# EAGLE board Steeringwheel (EAGLE 9.7.0)
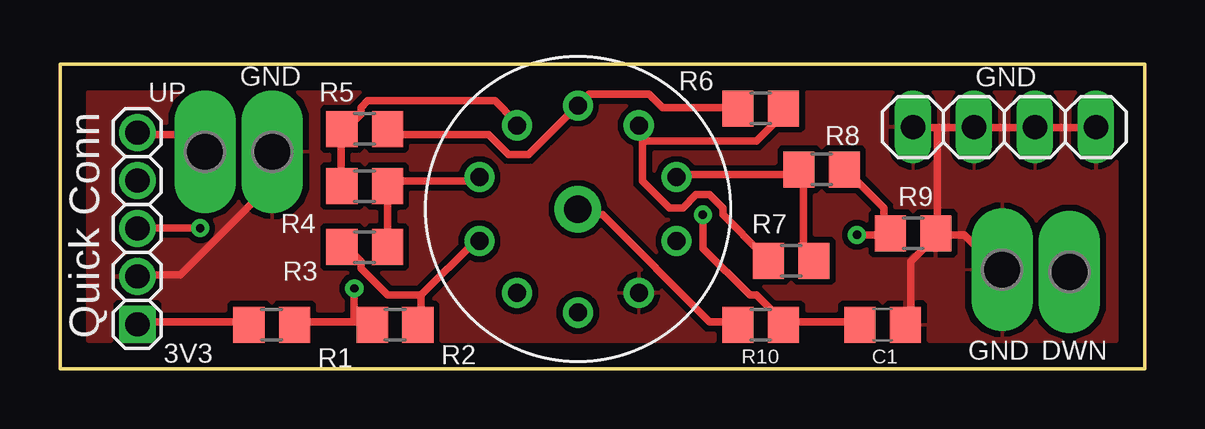
[diagram p0: board, top side]
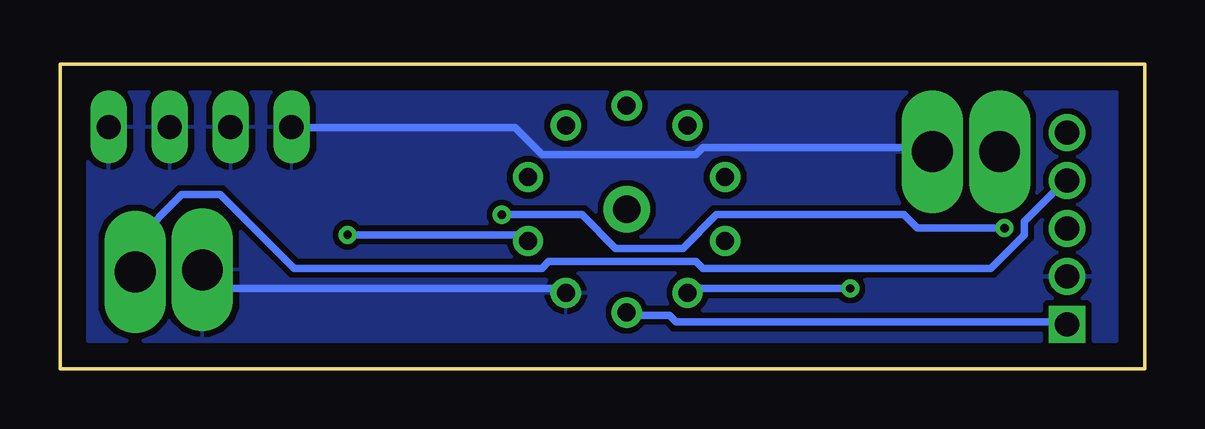
[diagram p1: board, bottom side, seen from below]

Size 45.21 x 12.7 mm. Coordinates in mm from the lower left corner, seen from the top.
Outline: 0,0 0,12.7 45.21,12.7 45.21,0 0,0
Copper layers (1*16): Top 0.035mm / dielectric 1.5mm / Bottom 0.035mm
Design rules "default": minimum track width 6mil, minimum drill 0.35mm, track to track 6mil, track to pad 6mil, pad to pad 6mil, via to via 6mil, smd to smd 6mil, copper to edge 40mil, drill to drill 6mil, minimum pad ring 10mil, minimum via ring 8mil, stop-mask expansion 4mil, vias tented up to drill 0mil, thermal gap 10mil
Net classes: 0 default: width 0.305 mm, clearance 0.254 mm

## Footprints (pad centres in the part's own frame; a part is rotated, then mirrored left to right if it is on the bottom)
C0805 = smd 1.3 x 1.5: 1 -0.95,0; 2 0.95,0
1X04 = drill 1.016 long: 1 -3.81,0; 2 -1.27,0; 3 1.27,0; 4 3.81,0
1_05X2MM = drill 1.016 pad 1.3 square: 1 -4,0 | drill 1.016 pad 1.3: 2 -2,0; 3 0,0; 4 2,0; 5 4,0
R0805 = smd 1.3 x 1.5: 1 -0.95,0; 2 0.95,0
P1-17Y = drill 1.702 pad 2.121 long: TP 0,0
56DP36-01-1-AJN = drill 1.152 pad 1.93: COMMON 0,0 | drill 0.75: P1 0,4.318; P2 2.538,3.493; P3 4.107,1.334; P4 4.107,-1.334; P5 2.538,-3.493; P6 0,-4.318; P7 -2.538,-3.493; P8 -4.107,-1.334; P9 -4.107,1.334; P10 -2.538,3.493

## Placement (x,y rotation side)
C1  [C0805]  34.29,1.84 180 top
GND  PINHD-1X4  [1X04]  39.37,10.08 0 top
QUICK_CONN  PINHD-1X55X2MM  [1_05X2MM]  3.23,5.85 90 top
R1  [R0805]  8.83,1.84 0 top
R2  [R0805]  13.97,1.84 0 top
R3  [R0805]  12.7,5.08 0 top
R4  [R0805]  12.7,7.62 180 top
R5  [R0805]  12.7,10.01 0 top
R6  [R0805]  29.21,10.86 0 top
R7  [R0805]  30.48,4.51 0 top
R8  [R0805]  31.75,8.32 0 top
R9  [R0805]  35.56,5.65 0 top
R10  [R0805]  29.21,1.84 180 top
SHIFT-DOWN_GND  PTR1PAD1-17Y  [P1-17Y]  39.27,4.13 0 top
SHIFT-DOWN_SIGNAL  PTR1PAD1-17Y  [P1-17Y]  42.08,4.04 0 top
SHIFT-UP_GND  PTR1PAD1-17Y  [P1-17Y]  8.85,9.06 0 top
SHIFT-UP_SIGNAL  PTR1PAD1-17Y  [P1-17Y]  6.05,9.06 0 top
U$1  56DP36-01-1-AJN  [56DP36-01-1-AJN]  21.59,6.66 180 top

## Library data of the parts
C1 = rcl; SPICEPREFIX: C
GND QUICK_CONN = Connector; CATEGORY: CONNECTOR; SUB-CATEGORY: PIN-HEADER
R1-R10 = rcl; SPICEPREFIX: R
SHIFT-DOWN_GND SHIFT-DOWN_SIGNAL SHIFT-UP_GND SHIFT-UP_SIGNAL = testpad
U$1 = Grayhill_56DP36-01-1-AJN

## Nets
+5V: QUICK_CONN.1 R1.1 U$1.P1
GND: C1.1 GND.1 GND.2 GND.3 GND.4 QUICK_CONN.2 R9.2 SHIFT-DOWN_GND.TP SHIFT-UP_GND.TP U$1.P10
N$1: R1.2 R2.1 U$1.P2
N$2: R2.2 R3.1 U$1.P3
N$3: R3.2 R4.1 U$1.P4
N$4: R5.2 R6.1 U$1.P6
N$5: R6.2 R7.1 U$1.P7
N$6: R7.2 R8.1 U$1.P8
N$7: R8.2 R9.1 U$1.P9
N$8: QUICK_CONN.5 SHIFT-UP_SIGNAL.TP
N$9: QUICK_CONN.4 SHIFT-DOWN_SIGNAL.TP
N$10: R4.2 R5.1 U$1.P5
N$13: R10.2 U$1.COMMON
OUTPUT: C1.2 QUICK_CONN.3 R10.1

## Tracks (layer width: path | path; a pad name or v marks a point on that pad's centre or on a via)
+5V
  Top 0.305: R1.1 7.8,1.96 3.33,1.96 QUICK_CONN.1
  Bottom 0.305: U$1.P1 21.49,2.23 19.81,2.23 19.53,1.96 3.33,1.96 QUICK_CONN.1
GND
  Top 0.305: QUICK_CONN.2 3.33,3.91 5,3.91 8.64,7.54 8.64,8.94 SHIFT-UP_GND.TP | 36.58,10.06 37.97,10.06 GND.2 38.25,10.06 40.49,10.06 GND.3 40.77,10.06 43,10.06 GND.4 | 36.58,10.06 35.74,10.06 GND.1 | 36.58,5.59 35.46,4.47 35.46,1.96 C1.1 | 36.58,5.59 37.69,5.59 39.09,4.19 SHIFT-DOWN_GND.TP | 36.58,5.59 R9.2 36.58,5.87 36.58,10.06
  Bottom 0.305: U$1.P10 24.28,3.35 38.53,3.35 39.09,3.91 SHIFT-DOWN_GND.TP | SHIFT-UP_GND.TP 8.91,9.22 18.41,9.22 18.69,8.94 25.12,8.94 26.24,10.06 35.46,10.06 GND.1
  pour Top: -1.27,13.97 -1.27,-2.54 46.99,-2.54 46.99,12.7 45.72,13.97
  pour Bottom: -1.27,13.97 -1.27,-2.54 46.99,-2.54 46.99,13.97
N$1  (via drill 0.35)
  Top 0.305: 12.27,1.96 12.83,1.96 R2.1 | 12.27,1.96 10.03,1.96 R1.2 | 12.27,1.96 v12.27,3.35
  Bottom 0.305: v12.27,3.35 18.97,3.35 U$1.P2
N$2
  Top 0.305: 15.06,3.07 15.06,1.96 R2.2 | 15.06,3.07 17.3,5.31 U$1.P3 | 15.06,3.07 13.66,3.07 12.55,4.19 12.55,4.47 11.99,5.03 R3.1
N$3
  Top 0.305: R3.2 13.66,5.31 13.66,7.54 R4.1 13.66,7.82 17.3,7.82 U$1.P4
N$4
  Top 0.305: R5.2 13.66,9.78 17.86,9.78 18.69,8.94 19.53,8.94 21.49,10.9 U$1.P6 21.77,11.18 22.05,11.46 24.56,11.46 25.12,10.9 28.19,10.9 R6.1
N$5
  Top 0.305: 24.28,9.5 24.28,10.06 U$1.P7 | 24.28,9.5 24.28,7.82 25.4,6.71 25.96,6.71 26.52,7.26 27.08,7.26 27.64,6.71 27.64,6.43 29.31,4.75 R7.1 | 24.28,9.5 29.03,9.5 30.15,10.62 R6.2
N$6
  Top 0.305: R7.2 31.27,4.75 30.99,5.03 30.99,8.1 R8.1 30.71,8.1 25.96,8.1 U$1.P8
N$7  (via drill 0.35)
  Top 0.305: R8.2 32.94,8.1 34.34,6.71 34.34,5.87 R9.1 34.34,5.59 v33.22,5.59
  Bottom 0.305: v33.22,5.59 25.96,5.59 U$1.P9
N$8
  Top 0.305: QUICK_CONN.5 3.33,9.78 5.28,9.78 5.84,9.22 SHIFT-UP_SIGNAL.TP
N$9
  Bottom 0.305: QUICK_CONN.4 3.33,7.82 5,6.15 5,5.59 6.4,4.19 18.41,4.19 18.69,4.47 24.84,4.47 25.12,4.19 35.46,4.19 38.53,7.26 39.93,7.26 40.13,7.26 42.08,5.31 SHIFT-DOWN_SIGNAL.TP
N$10
  Top 0.305: R4.2 11.71,7.82 11.71,9.78 R5.1 11.99,10.06 12.55,10.62 12.55,10.9 12.83,11.18 18.14,11.18 18.97,10.34 U$1.P5
N$13
  Top 0.305: R10.2 28.19,1.96 27.08,1.96 22.61,6.43 21.77,6.43 U$1.COMMON
OUTPUT  (via drill 0.35)
  Top 0.305: C1.2 33.22,1.96 30.43,1.96 R10.1 30.15,1.96 29.03,3.07 28.75,3.07 26.8,5.03 v26.8,6.43 | v5.84,5.87 3.33,5.87 QUICK_CONN.3
  Bottom 0.305: v26.8,6.43 23.44,6.43 22.05,5.03 19.25,5.03 17.86,6.43 10.03,6.43 9.47,5.87 v5.84,5.87

## Text on the board
tNames: GND | UP | Quick Conn | 3V3 | GND | DWN